# Altium PCB DPPXHK.PcbDoc (part 3 of 3)
Units mm, origin at the board's own origin, x right, y up, seen from the top; angles counter-clockwise.
Board outline 90 x 49 mm, 4 copper layers (Top Layer, ground_plane, source, Bottom Layer), stack 0.778 mm thick; 169 components, 237 nets, 996 pads, 341 vias.
Unrouted connection lines stored in the file: 220.
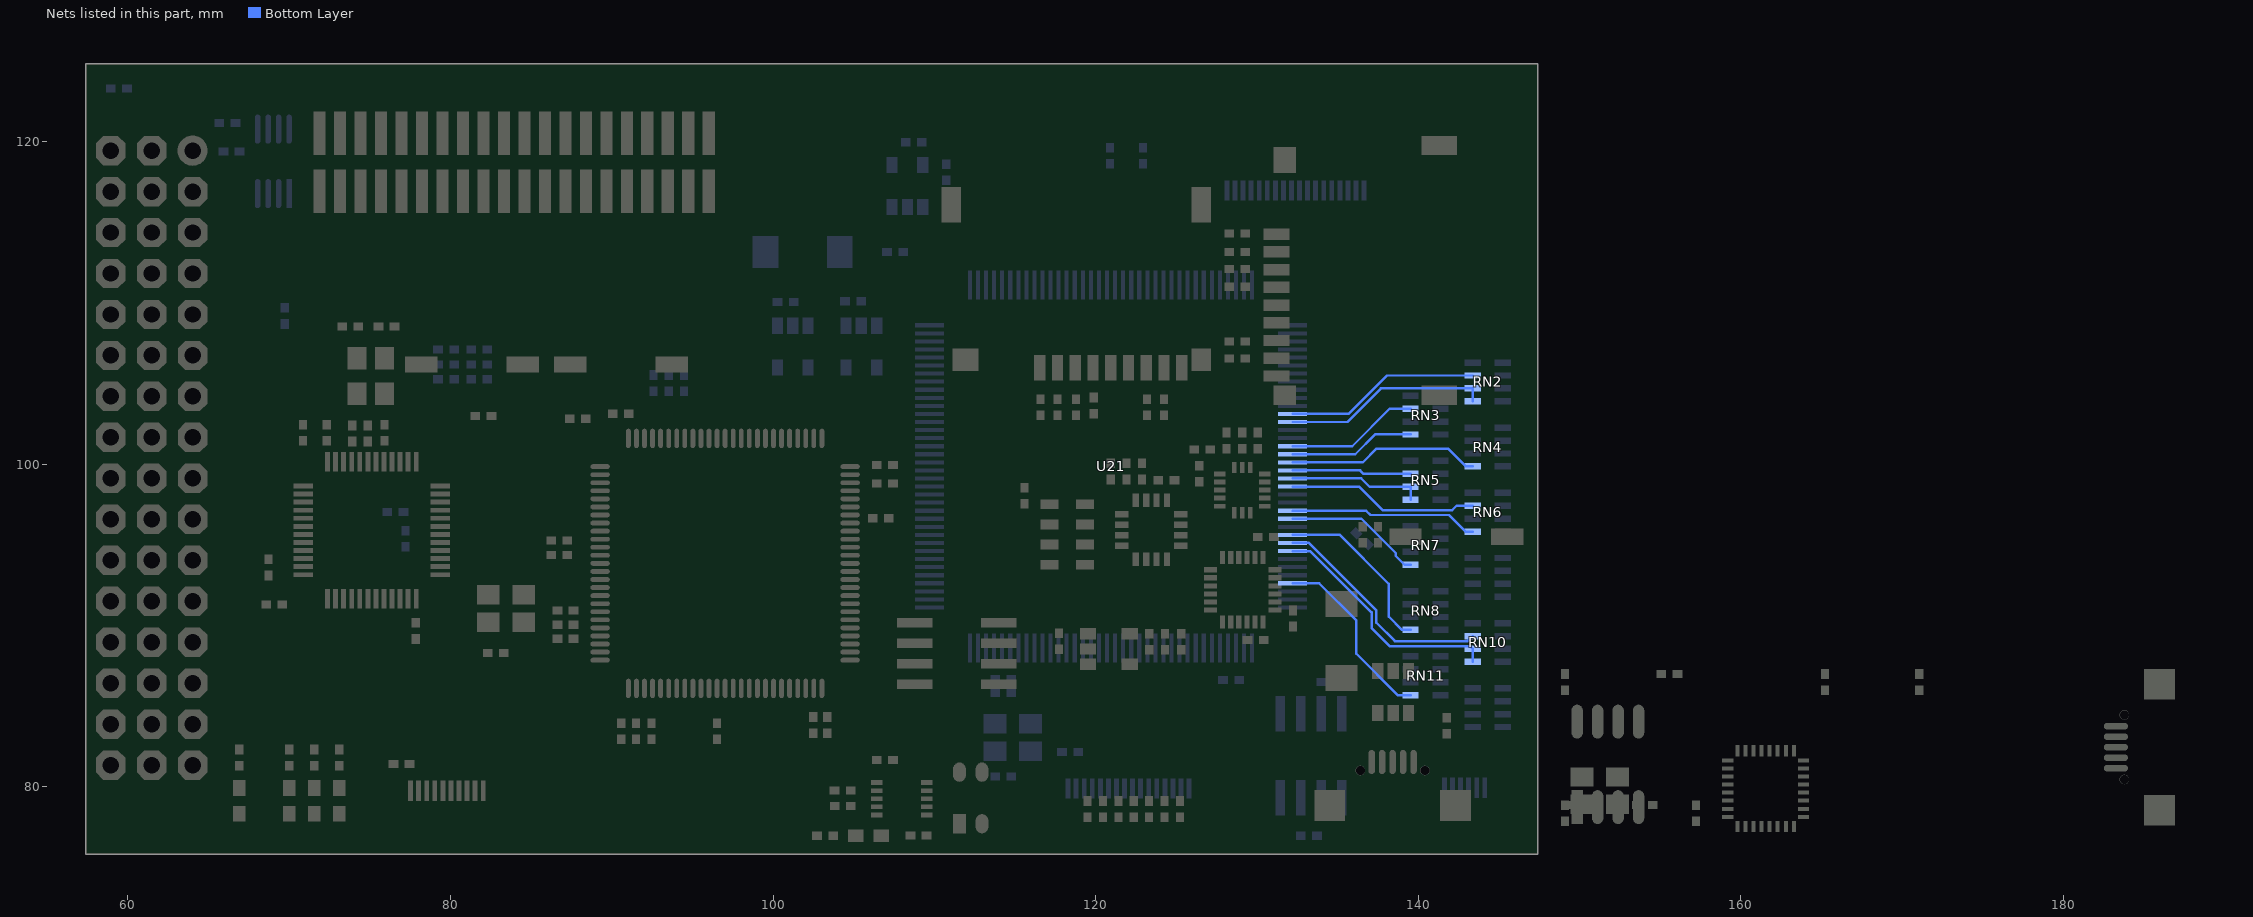
[diagram p5: the nets of this part, all layers, seen from the top]

## Via types
v1: diameter 0.508, hole 0.254, Top Layer to Bottom Layer, 256 vias
v2: diameter 0.61, hole 0.305, Top Layer to Bottom Layer, 81 vias
v3: diameter 1, hole 1, Top Layer to Bottom Layer, 4 vias

## Nets (pads, with @x,y where several pads share a name; then routed paths per layer and width w, separated by ;. In a path a pad name is that pad's centre, name@x,y a point inside that pad or via, vN(x,y) a via of type N, cw(c..) or ccw(c..) an arc to the next point about the centre after c; other vN are vias at no path point) (continued)
VGAD2: RN11.5 U21.141 | length 11.4
  Bottom Layer w0.152: U21.141@132.207,92.615 132.212,92.62 133.858,92.62 136.169,90.309 136.169,88.244 138.726,85.687 RN11.5@139.534,85.687
VGAD3: RN10.7 U21.136 | length 14.3
  Bottom Layer w0.152: U21.136@132.207,95.115 133.231,95.115 137.414,90.932 137.414,90.17 138.557,89.027 143.065,89.027 RN10.7@143.383,89.345
VGAD4: RN10.5 RN10.6 U21.137 | length 15.1
  Bottom Layer w0.152: U21.137@132.207,94.615 133.3,94.615 137.109,90.806 137.109,89.84 138.227,88.722 143.206,88.722 RN10.6@143.383,88.545 RN10.5@143.383,87.745
VGAD5: RN8.5 U21.135 | length 11
  Bottom Layer w0.152: U21.135@132.207,95.615 135.144,95.615 138.176,92.583 138.176,90.551 139.001,89.726 RN8.5@139.534,89.726
VGAD6: RN7.5 U21.133 | length 8.6
  Bottom Layer w0.152: U21.133@132.207,96.615 136.48,96.615 138.608,94.487 138.608,94.31 139.153,93.765 RN7.5@139.534,93.765
VGAD7: RN6.7 U21.129 | length 11.9
  Bottom Layer w0.152: U21.129@132.207,98.615 136.335,98.615 137.795,97.155 142.113,97.155 142.381,97.423 RN6.7@143.383,97.423
VGAD8: RN6.5 U21.132 | length 11.7
  Bottom Layer w0.152: U21.132@132.207,97.115 132.218,97.104 136.78,97.104 137.034,96.85 141.91,96.85 142.937,95.823 RN6.5@143.383,95.823
VGAD9: RN5.7 U21.127 | length 7.4
  Bottom Layer w0.152: U21.127@132.207,99.615 136.401,99.615 136.612,99.404 RN5.7@139.534,99.404
VGAD10: RN5.5 RN5.6 U21.128 | length 8.3
  Bottom Layer w0.152: U21.128@132.207,99.115 136.47,99.115 136.981,98.604 RN5.6@139.534,98.604 RN5.5@139.534,97.804
VGAD11: RN4.5 U21.126 | length 12
  Bottom Layer w0.152: U21.126@132.207,100.115 136.564,100.115 137.414,100.965 141.859,100.965 142.963,99.861 RN4.5@143.383,99.861
VGAD12: RN3.7 U21.124 | length 8.3
  Bottom Layer w0.152: U21.124@132.207,101.115 135.913,101.115 138.24,103.442 RN3.7@139.534,103.442
VGAD13: RN3.5 U21.125 | length 7.8
  Bottom Layer w0.152: U21.125@132.207,100.615 136.098,100.615 137.325,101.842 RN3.5@139.534,101.842
VGAD14: RN2.7 U21.120 | length 12.2
  Bottom Layer w0.152: U21.120@132.207,103.115 135.677,103.115 138.062,105.5 RN2.7@143.383,105.5
VGAD15: RN2.5 RN2.6 U21.121 | length 12.8
  Bottom Layer w0.152: U21.121@132.207,102.615 135.608,102.615 137.693,104.7 RN2.6@143.383,104.7 RN2.5@143.383,103.9
pads on no net: J1.8 J1.37 J1.38 J1.39 J1.40 J2.5 J2.8 J2.11 J2.14 J2.17 J2.20 J2.23 J2.26 J2.29 J2.32 J2.35 J2.38 J2.41 J2.44 J2.47 J4.5 P1.7 P1.8 P1.9 P1.10 P4.0 P4.sd P6.0 P6.sd RN2.1 RN2.8 RN3.3 RN3.6 RN5.1 RN5.8 RN6.3 RN6.6 RN10.1 RN10.8 RN11.3 RN11.6 U3.4 U4.4 U5.2 U5.3 U5.4 U5.6 U5.25 U5.32 U5.39 U5.42 U5.43 U11.13 U11.16 U11.18 U11.33 U11.34 U11.41 U11.46 U11.51 U11.77 U11.92 U13.7 U14.2 U14.3 U14.4 U14.5 U14.6 U14.7 U14.11 U14.14 U14.15 U14.16 U14.17 U14.19 U14.21 U14.22 U15.4 U19.1 U19.3 U21.2 U21.3 U21.7 U21.10 U21.11 U21.22 U21.24 U21.25 U21.33 U21.34 U21.43 U21.44 U21.46 U21.72 U21.73 U21.74 U21.75 U21.88 U23.4 U24.4 U25.15 U25.26 U25.27 U25.29 U26.4 U26.5
copper on no net: | length 125.9
  Top Layer w0.152: 68.453,79.921 68.453,81.311 ; 75.692,120.523 75.692,121.949 v2(75.692,123.571) ; v1(77.978,78.105) 78.002,78.129 78.002,79.756 ; 81.502,79.756 81.534,79.788 81.534,81.966 82.55,82.982 ; v1(81.661,78.105) 82.002,78.446 82.002,79.756 ; 89.278,97.282 v1(90.678,97.282) ; v2(94.742,114.046) 94.742,115.497 94.742,116.923 ; 94.742,120.523 94.742,121.949 v2(94.742,123.571) ; v2(96.012,114.046) 96.012,115.497 96.012,116.923 ; 96.012,120.523 96.012,121.949 v2(96.012,123.571) ; 140.865,86.332 142.339,86.332 143.002,86.995 143.002,90.424 v2(142.494,90.932) ; 142.684,84.279 143.636,84.279 143.636,85.675 144.344,86.383
  ground_plane w0.152: v1(77.978,78.105) v1(81.661,78.105) ; v1(85.344,97.282) v1(90.678,97.282) 91.186,96.774 v1(102.235,96.774)
  source w0.152: 82.55,97.282 v1(85.344,97.282) ; v1(102.235,93.218) v1(102.235,96.774)
  Bottom Layer w0.152: 95.083,88.646 97.663,88.646 98.476,89.459 98.476,93.192 100.204,94.92 106.525,94.92 107.33,94.115 109.707,94.115 ; 95.083,89.916 97.409,89.916 98.171,90.678 98.171,93.318 100.077,95.225 106.651,95.225 107.261,94.615 109.707,94.615 ; 99.409,84.773 99.409,86.582 100.076,87.249 100.076,92.194 100.338,92.456 ; v1(102.235,93.218) 102.1,93.218 101.338,92.456 102.235,91.559 102.235,91.19 102.239,91.186 ; 102.239,88.646 103.128,88.646 104.652,87.122 105.967,87.122 107.153,88.308 ; 102.239,89.916 102.874,89.916 104.643,91.686 105.975,91.686 107.153,90.508 ; v1@113.104,113.337 113.104,114.25 113.223,114.369 113.223,115.901
  other v1: 160.744,79.083 162.344,79.083 160.744,80.683 162.344,80.683 113.157,113.284
  other v3: 141.721,107.064 141.721,115.064 115.741,116.478 123.741,116.478

## Keep-outs
Keep-Out Layer:
  the board outline again, w0.254

## Silkscreen, mask and mechanical layers (free items; w line width, h text height)
Top Overlay:
  the board outline again, w0.254
Mechanical 1:
  the board outline again, w0.254